# EAGLE board ard_card (EAGLE 5.09)
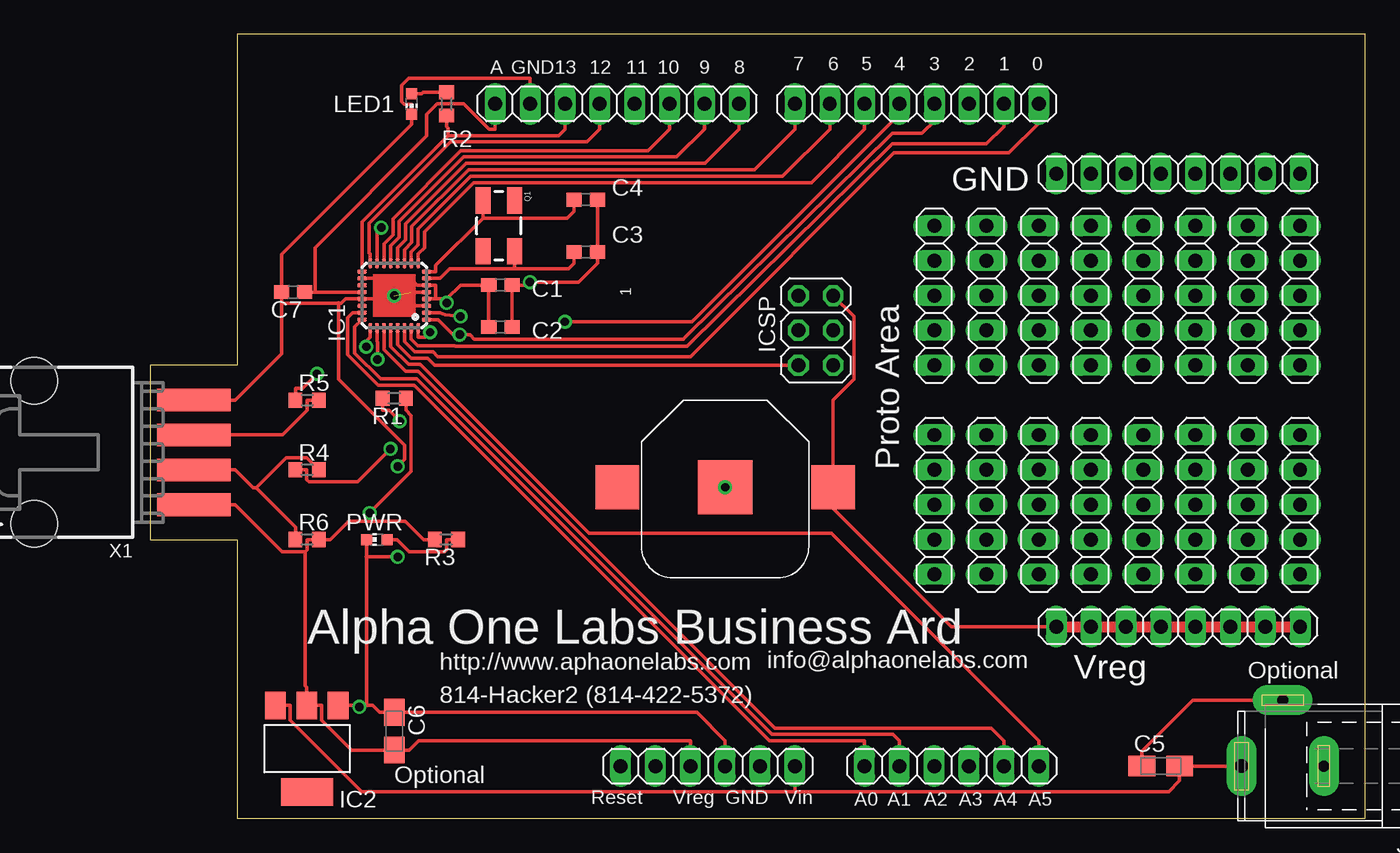
[diagram p0: board, top side]
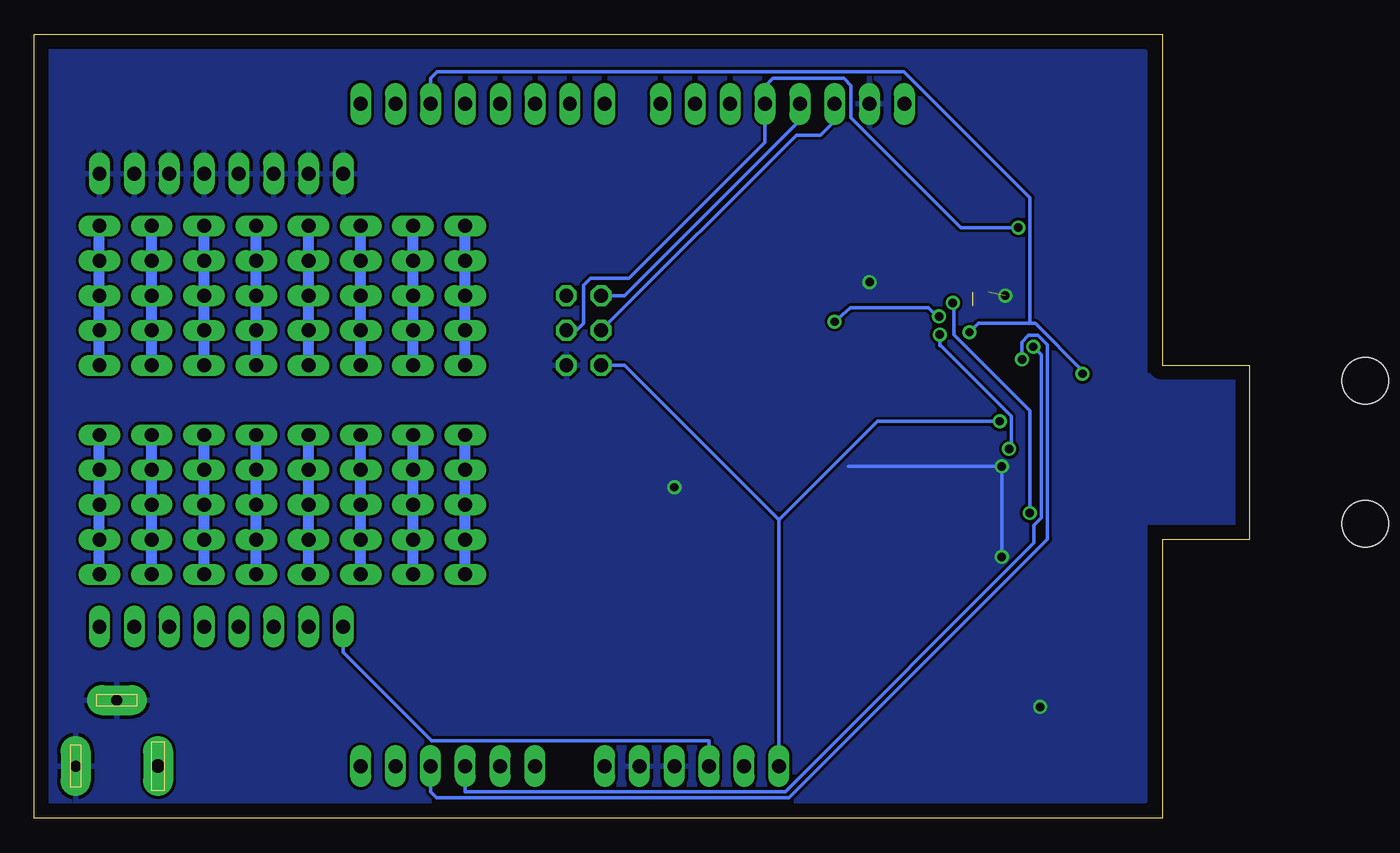
[diagram p1: board, bottom side, seen from below]

Size 88.57 x 57.14 mm. Coordinates in mm from the lower left corner, seen from the top.
Outline: 6.35,0 88.57,0 88.57,57.14 6.35,57.14 6.35,33.02 0,33.02 0,20.32 6.35,20.32 6.35,0
Copper layers (1*16): Top 0.035mm / dielectric 1.5mm / Bottom 0.035mm
Design rules "default": minimum track width 10mil, minimum drill 24mil, track to track 8mil, track to pad 8mil, pad to pad 8mil, via to via 8mil, smd to smd 8mil, copper to edge 40mil, drill to drill 8mil, minimum pad ring 10mil, minimum via ring 8mil, stop-mask expansion 4mil, vias tented up to drill 0mil, thermal gap 10mil
tRestrict: area 17.1,37.3 to 18.5,38.7
vRestrict: area 10.2,6.3 to 63.5,15.2; area 52.7,25.4 to 54.6,38.1; area 58.4,45.7 to 63.5,48.3

## Footprints (pad centres in the part's own frame; a part is rotated, then mirrored left to right if it is on the bottom)
BATTCON_12MM = smd 3.962 x 3.962: GND 0,0 | smd 3.175 x 3.175: PWR@1 -7.874,0; PWR@2 7.874,0
C0603 = smd 1.1 x 1: 1 -0.85,0; 2 0.85,0
A/3216-18R = smd 1.95 x 1.5: + 1.375,0; - -1.375,0
MLF32 = smd 0.7 x 0.3: 1 -2.35,1.75; 2 -2.35,1.25; 3 -2.35,0.75; 4 -2.35,0.25; 5 -2.35,-0.25; 6 -2.35,-0.75; 7 -2.35,-1.25; 8 -2.35,-1.75; 17 2.35,-1.75; 18 2.35,-1.25; 19 2.35,-0.75; 20 2.35,-0.25; 21 2.35,0.25; 22 2.35,0.75; 23 2.35,1.25; 24 2.35,1.75 | smd 0.3 x 0.7: 9 -1.75,-2.35; 10 -1.25,-2.35; 11 -0.75,-2.35; 12 -0.25,-2.35; 13 0.25,-2.35; 14 0.75,-2.35; 15 1.25,-2.35; 16 1.75,-2.35; 25 1.75,2.35; 26 1.25,2.35; 27 0.75,2.35; 28 0.25,2.35; 29 -0.25,2.35; 30 -0.75,2.35; 31 -1.25,2.35; 32 -1.75,2.35
SOT223 = smd 1.499 x 2.007: 1 -2.261,-3.15; 2 0.025,-3.15; 3 2.311,-3.15 | smd 3.81 x 2.007: 4 0,3.15
2X03 = drill 1.016 octagon: 1 -2.54,-1.27; 2 -2.54,1.27; 3 0,-1.27; 4 0,1.27; 5 2.54,-1.27; 6 2.54,1.27
1X08 = drill 1.016 long: 1 -8.89,0; 2 -6.35,0; 3 -3.81,0; 4 -1.27,0; 5 1.27,0; 6 3.81,0; 7 6.35,0; 8 8.89,0
1X06 = drill 1.016 long: 1 -6.35,0; 2 -3.81,0; 3 -1.27,0; 4 1.27,0; 5 3.81,0; 6 6.35,0
SPC4078 = drill 0.8 pad 2.184 long: 1 -3,0; 2 0,-4.8 | drill 1 pad 2.184 long: 3 3,0
1X05 = drill 1.016 long: 1 -5.08,0; 2 -2.54,0; 3 0,0; 4 2.54,0; 5 5.08,0
CHIP-LED0603 = smd 0.8 x 0.8: A 0,-0.75; C 0,0.75
CRYSTAL-SMD-5X3 = smd 1.9 x 1.1: 1 -1.85,-1.15; 2 1.85,-1.15; 3 1.85,1.15; 4 -1.85,1.15
R0603 = smd 1 x 1.1: 1 -0.85,0; 2 0.85,0
15-91-04 = smd 1.651 x 5.334: 1 -3.81,-10.795; 2 -1.27,-10.795; 3 1.27,-10.795; 4 3.81,-10.795 | hole 3.404: -5.207,0.838; 5.207,0.838

## Placement (x,y rotation side)
BAT1  3v  [BATTCON_12MM]  41.91,24.13 180 top
C1  100nf  [C0603]  25.53,38.86 0 top
C2  100nf  [C0603]  25.53,35.81 0 top
C3  20pf  [C0603]  31.75,41.27 0 top
C4  20pf  [C0603]  31.75,45.09 0 top
C5  4.7uf  [A/3216-18R]  73.66,3.81 0 top
C6  4.7uf  [A/3216-18R]  17.78,6.35 270 top
C7  100nf  [C0603]  10.41,38.35 180 top
IC1  MEGA48/88/168-MU  [MLF32]  17.78,38.1 180 top
IC2  REG1117  [SOT223]  11.43,5.08 180 top
ICSP  [2X03]  48.51,35.56 270 top
J1  [1X08]  55.88,52.07 180 top
J2  [1X06]  58.42,3.81 0 top
J3  [1X08]  34.04,52.07 180 top
J4  [SPC4078]  82.55,3.81 180 top
JP1  [1X05]  57.15,38.1 90 top
JP2  [1X05]  60.96,38.1 90 top
JP3  [1X06]  40.64,3.81 0 top
JP4  [1X05]  64.77,38.1 90 top
JP5  [1X05]  68.58,38.1 90 top
JP6  [1X05]  72.39,38.1 90 top
JP7  [1X05]  76.2,38.1 90 top
JP8  [1X05]  80.01,38.1 90 top
JP9  [1X05]  83.82,38.1 90 top
JP10  [1X05]  57.15,22.86 90 top
JP11  [1X05]  64.77,22.86 90 top
JP12  [1X05]  60.96,22.86 90 top
JP13  [1X05]  68.58,22.86 90 top
JP14  [1X05]  72.39,22.86 90 top
JP15  [1X05]  76.2,22.86 90 top
JP16  [1X05]  80.01,22.86 90 top
JP17  [1X05]  83.82,22.86 90 top
JP18  [1X08]  74.93,13.97 180 top
JP19  [1X08]  74.93,46.99 180 top
LED1  [CHIP-LED0603]  19.05,52.07 180 top
PWR  [CHIP-LED0603]  16.51,20.32 90 top
Q1  16MHz  [CRYSTAL-SMD-5X3]  25.4,43.18 270 top
R1  10k  [R0603]  17.78,30.61 180 top
R2  1k  [R0603]  21.59,52.07 90 top
R3  1k  [R0603]  21.59,20.32 180 top
R4  68  [R0603]  11.43,25.4 0 top
R5  68  [R0603]  11.43,30.48 0 top
R6  1k  [R0603]  11.43,20.32 0 top
U$1  [A1_SMALL]  41.91,17.78 0 bottom
X1  C-GRID-04-15-91  [15-91-04]  -7.62,26.67 90 top

## Library data of the parts
BAT1 Q1 = SparkFun.1
C1-C7 R1-R6 = rcl
IC1 = avr-6
IC2 = burr-brown
ICSP J1-J3 JP1-JP19 = pinhead
J4 = con-jack
LED1 PWR = led
U$1 = A1
X1 = con-molex

## Nets
AREF: C7.1 IC1.20 J3.8
D+: IC1.32 J1.3 R5.1
D-: IC1.1 J1.4 R4.1
GND: BAT1.GND C1.2 C2.2 C3.2 C4.2 C5.- C6.- C7.2 IC1.3 IC1.5 IC1.21 IC2.1 ICSP.6 J3.7 J4.1 J4.2 JP3.4 JP3.5 JP19.1 JP19.2 JP19.3 JP19.4 JP19.5 JP19.6 JP19.7 JP19.8 LED1.C PWR.C X1.4
MISO: IC1.16 ICSP.1 J3.5
MOSI: IC1.15 ICSP.4 J3.4
N$1: C3.1 IC1.7 Q1.3
N$2: C4.1 IC1.8 Q1.1
N$3: PWR.A R3.1
N$4: R5.2 X1.3
N$6: LED1.A R2.2
N$7: IC1.23 J2.1
N$8: IC1.24 J2.2
N$9: IC1.25 J2.3
N$10: IC1.26 J2.4
N$11: IC1.27 J2.5
N$12: IC1.28 J2.6
N$13: IC1.30 J1.1
N$14: IC1.31 J1.2
N$15: R4.2 R6.1 X1.2
N$16: JP1.1 JP1.2 JP1.3 JP1.4 JP1.5
N$17: IC1.2 J1.5
N$18: IC1.9 J1.6
N$19: IC1.10 J1.7
N$20: IC1.11 J1.8
N$21: IC1.12 J3.1
N$22: IC1.13 J3.2
N$23: JP2.1 JP2.2 JP2.3 JP2.4 JP2.5
N$24: JP4.1 JP4.2 JP4.3 JP4.4 JP4.5
N$25: JP5.1 JP5.2 JP5.3 JP5.4 JP5.5
N$26: JP6.1 JP6.2 JP6.3 JP6.4 JP6.5
N$27: JP7.1 JP7.2 JP7.3 JP7.4 JP7.5
N$28: JP8.1 JP8.2 JP8.3 JP8.4 JP8.5
N$29: JP9.1 JP9.2 JP9.3 JP9.4 JP9.5
N$30: JP10.1 JP10.2 JP10.3 JP10.4 JP10.5
N$31: JP11.1 JP11.2 JP11.3 JP11.4 JP11.5
N$32: JP12.1 JP12.2 JP12.3 JP12.4 JP12.5
N$33: JP13.1 JP13.2 JP13.3 JP13.4 JP13.5
N$34: JP14.1 JP14.2 JP14.3 JP14.4 JP14.5
N$35: JP15.1 JP15.2 JP15.3 JP15.4 JP15.5
N$36: JP16.1 JP16.2 JP16.3 JP16.4 JP16.5
N$37: JP17.1 JP17.2 JP17.3 JP17.4 JP17.5
RESET: IC1.29 ICSP.5 JP3.1 R1.2
SCK: IC1.17 ICSP.3 J3.6 R2.1
SS: IC1.14 J3.3
VIN: C5.+ IC2.3 J4.3 JP3.6
VREG: BAT1.PWR@1 C1.1 C2.1 C6.+ IC1.4 IC1.6 IC1.18 IC2.2 ICSP.2 JP3.3 JP18.1 JP18.2 JP18.3 JP18.4 JP18.5 JP18.6 JP18.7 JP18.8 R1.1 R3.2 R6.2 X1.1

## Tracks (layer width: path | path; a pad name or v marks a point on that pad's centre or on a via)
AREF
  Top 0.254: 12.01,38.35 IC1.20 | 12.01,38.35 12.01,41.59 20.15,49.73 20.15,51.3 20.92,52.07 22.84,52.07 24.69,50.22 25.15,50.22 J3.8 | C7.1 12.01,38.35
D+  (via drill 0.61 pad 1.02)
  Top 0.254: IC1.32 19.53,35.07 20.04,35.07 v20.39,35.42 | R5.1 10.58,31.36 11.11,31.36 v12.15,32.4
  Bottom 0.254: 15.97,36.07 15.6,36.07 12.15,32.61 v12.15,32.4 | 15.97,36.07 15.97,45.22 25.16,54.4 59.21,54.4 59.69,53.92 J1.3 | 15.97,36.07 19.75,36.07 v20.39,35.42
D-  (via drill 0.61 pad 1.02)
  Top 0.254: IC1.1 20.97,36.35 22.07,35.25 v22.56,35.25 23.3,35.25 23.62,34.92 38.86,34.92 38.99,35.05 54.1,49.91 56.26,49.91 57.28,50.93 57.28,51.94 J1.4 | R4.1 11.41,25.4 11.41,24.67 11.56,24.52 15.11,24.52 v17.51,26.92
  Bottom 0.254: v17.51,26.92 17.35,27.09 17.35,29.3 22.47,34.42 22.56,34.42 v22.56,35.25
GND  (via drill 0.61, 0.61 pad 1.02)  (2 unrouted)
  Top 0.254: X1.4 6.17,30.48 9.56,33.87 9.56,37.52 | 9.56,37.52 C7.2 9.56,41.1 19.05,50.59 LED1.C 19.05,52.05 18.5,52.05 18.32,52.23 18.32,53.42 18.83,53.92 27.69,53.92 J3.7 | 13.72,37.52 9.56,37.52 | 13.72,37.52 13.92,37.52 14.24,37.85 IC1.21 16.6,37.85 | C2.2 C1.2 27.26,38.86 27.48,39.08 v27.67,39.08 31.24,39.08 32.6,40.45 C3.2 C4.2 | C5.- 72.28,4.89 76,8.61 J4.2 | IC1.5 19.02,38.35 | IC1.3 19.02,37.35 | JP3.4 41.91,5.66 39.85,7.72 C6.- 16.7,7.72 16.2,8.23 15.76,8.23 | 15.24,8.23 15.76,8.23 | 15.76,8.23 15.76,19.05 | 15.76,19.05 PWR.C | IC2.1 15.24,8.23 | 15.24,8.23 v15.24,8.13 | 15.76,19.05 v18.03,19.05 | v18.03,25.65 18.54,26.16 18.54,27.18 13.72,32 13.72,37.52 | 15.76,19.05 15.75,19.05 | 13.72,37.52 13.72,37.59
  Bottom 0.254: v18.03,19.05 v18.03,25.65 29.21,25.65
  other vias: 17.78,38.1 41.91,24.13
  pour Bottom: 7.62,55.88 87.63,55.88 87.63,1.27 7.62,1.27 7.62,21.59 0,21.59 0,31.75 0.51,31.75 0.51,32.26 7.62,32.26
  pour Top: 16.38,39.5 19.18,39.5 19.18,36.7 16.38,36.7
MISO
  Top 0.254: IC1.16 16.03,41.13 15.96,41.2 15.96,43.38 21.88,49.3 31.85,49.3 32.77,50.22 J3.5
  Bottom 0.254: J3.5 32.77,50.88 45.54,38.1 ICSP.1
MOSI  (via drill 0.61 pad 1.02)
  Top 0.254: v16.84,43.05 16.53,42.75 IC1.15
  Bottom 0.254: v16.84,43.05 21,43.05 29.02,51.07 29.02,53.4 29.54,53.92 34.72,53.92 35.31,53.34 J3.4 35.31,49.28 45.21,39.37 48.01,39.37 48.51,38.86 48.51,36.07 49.02,35.56 ICSP.4
N$1
  Top 0.254: IC1.7 21.12,39.35 21.82,40.05 26.55,40.05 | C3.1 30.9,40.45 30.5,40.05 26.55,40.05 | 26.55,40.05 Q1.3
N$2
  Top 0.254: IC1.8 20.81,39.85 20.81,40.31 24.25,43.75 | C4.1 30.9,44.26 30.39,43.75 24.25,43.75 | 24.25,43.75 Q1.1
N$3
  Top 0.254: PWR.A 17.99,20.32 18.88,19.43 21.45,19.43 21.61,19.59 21.61,20.32 R3.1
N$4
  Top 0.254: R5.2 11.45,30.48 11.45,29.75 9.64,27.94 X1.3
N$6
  Top 0.254: LED1.A 19.78,52.82 19.88,52.92 R2.2
N$7
  Top 0.254: IC1.23 14.75,36.85 14.38,36.48 14.38,33.8 16.59,31.58 19.23,31.58 45.14,5.66 52.07,5.66 J2.1
N$8
  Top 0.254: IC1.24 14.91,35.83 14.91,33.91 16.78,32.04 19.42,32.04 45.34,6.12 54.15,6.12 54.61,5.66 J2.2
N$9  (via drill 0.61 pad 1.02)
  Top 0.254: v15.75,34.37 15.75,34.79 16.03,35.07 IC1.25
  Bottom 0.254: v15.75,34.37 15.16,33.77 15.16,21.91 15.7,21.36 | 15.7,21.36 | 15.7,21.36 15.7,20.07 33.82,1.96 57.15,1.96 J2.3
N$10  (via drill 0.61 pad 1.02)
  Top 0.254: IC1.26 16.53,34.77 16.59,34.71 16.59,33.48 v16.56,33.45
  Bottom 0.254: v16.56,33.45 16.59,33.48 16.59,34.71 16.09,35.2 15.39,35.2 14.7,34.52 14.7,20.36 33.56,1.49 59.23,1.49 59.69,1.96 J2.4
N$11
  Top 0.254: IC1.27 17.03,35.07 17.04,35.06 17.04,34.15 18.62,32.57 19.53,32.57 45.52,6.58 61.31,6.58 62.23,5.66 J2.5
N$12
  Top 0.254: IC1.28 17.53,34.38 18.83,33.08 19.67,33.08 31.97,20.78 49.66,20.78 64.77,5.66 J2.6
N$13
  Top 0.254: IC1.30 18.53,34.75 19.28,34 20.61,34 20.95,33.66 39.37,33.66 54.23,48.51 62.61,48.51 64.77,50.67 J1.1
N$14
  Top 0.254: IC1.31 19.03,34.91 19.48,34.45 22.17,34.45 22.21,34.41 39.11,34.41 54.1,49.15 60.96,49.15 62.23,50.42 J1.2
N$15
  Top 0.254: 7.7,24.08 9.9,26.28 11.4,26.28 R4.2 | 7.7,24.08 7.5,24.08 6.17,25.4 6.06,25.4 X1.2 | 7.7,24.08 | 7.7,24.08 10.58,21.2 R6.1
N$16
  Bottom 0.813: JP1.5 JP1.4 JP1.3 JP1.2 JP1.1
N$17  (via drill 0.61)
  Top 0.254: v22.61,36.59 21.5,36.71 21.11,36.85 IC1.2 | v30.23,36.2 39.5,36.2 54.61,51.31 J1.5
  Bottom 0.254: v22.61,36.59 22.87,36.71 23.37,37.21 29.08,37.21 v30.23,36.2
N$18
  Top 0.254: IC1.9 19.53,41.13 19.98,41.58 19.98,42.76 23.55,46.33 48.19,46.33 52.07,50.22 J1.6
N$19
  Top 0.254: IC1.10 19.03,41.3 19.52,41.79 19.52,42.96 23.35,46.79 46.1,46.79 49.53,50.22 J1.7
N$20
  Top 0.254: IC1.11 18.53,41.44 19.06,41.98 19.06,43.15 23.2,47.28 44.06,47.28 46.99,50.22 J1.8
N$21
  Top 0.254: IC1.12 18.03,41.59 18.61,42.17 18.61,43.34 23.01,47.74 40.45,47.74 42.93,50.22 J3.1
N$22
  Top 0.254: IC1.13 17.53,41.74 18.15,42.36 18.15,43.52 22.82,48.2 38.37,48.2 40.39,50.22 J3.2
N$23
  Bottom 0.813: JP2.1 JP2.2 JP2.3 JP2.4 JP2.5
N$24
  Bottom 0.813: JP4.5 JP4.4 JP4.3 JP4.2 JP4.1
N$25
  Bottom 0.813: JP5.1 JP5.2 JP5.3 JP5.4 JP5.5
N$26
  Bottom 0.813: JP6.5 JP6.4 JP6.3 JP6.2 JP6.1
N$27
  Bottom 0.813: JP7.1 JP7.2 JP7.3 JP7.4 JP7.5
N$28
  Bottom 0.813: JP8.5 JP8.4 JP8.3 JP8.2 JP8.1
N$29
  Bottom 0.813: JP9.1 JP9.2 JP9.3 JP9.4 JP9.5
N$30
  Bottom 0.813: JP10.1 JP10.2 JP10.3 JP10.4 JP10.5
N$31
  Bottom 0.813: JP11.1 JP11.2 JP11.3 JP11.4 JP11.5
N$32
  Bottom 0.813: JP12.5 JP12.4 JP12.3 JP12.2 JP12.1
N$33
  Bottom 0.813: JP13.5 JP13.4 JP13.3 JP13.2 JP13.1
N$34
  Bottom 0.813: JP14.1 JP14.2 JP14.3 JP14.4 JP14.5
N$35
  Bottom 0.813: JP15.5 JP15.4 JP15.3 JP15.2 JP15.1
N$36
  Bottom 0.813: JP16.5 JP16.4 JP16.3 JP16.2 JP16.1
N$37
  Bottom 0.813: JP17.1 JP17.2 JP17.3 JP17.4 JP17.5
RESET  (via drill 0.61 pad 1.02)
  Top 0.254: IC1.29 18.03,34.53 19.02,33.54 20.21,33.54 20.73,33.02 ICSP.5 | R1.2 16.93,29.73 17.4,29.73 v18.19,28.94
  Bottom 0.254: v18.19,28.94 27.12,28.94 34.29,21.77 | JP3.1 34.29,21.77 | 34.29,21.77 45.54,33.02 ICSP.5
SCK
  Top 0.254: 21.69,49.76 15.43,43.49 IC1.17 | 21.69,49.76 29.77,49.76 30.23,50.22 J3.6 | 21.69,49.76 21.69,50.29 21.59,50.39 R2.1
  Bottom 0.254: J3.6 30.23,50.8 31.24,49.78 33.02,49.78 ICSP.3
SS
  Top 0.254: IC1.14 17.03,41.88 17.69,42.55 17.69,43.71 22.64,48.66 36.29,48.66 37.85,50.22 J3.3
VIN
  Top 0.254: 46.99,1.96 74.26,1.96 75.03,2.73 C5.+ J4.3 | IC2.3 10.2,8.23 10.2,7.15 15.39,1.96 46.99,1.96 | 46.99,1.96 JP3.6
VREG  (via drill 0.61 pad 1.02)
  Top 0.254: JP3.3 39.37,5.66 19.55,5.66 18.86,4.97 C6.+ 14.66,4.97 12.48,7.15 12.48,8.23 IC2.2 11.4,9.56 11.29,9.68 11.29,19.43 | 20.81,37.85 20.81,38.85 IC1.6 19.45,38.85 18.95,39.35 IC1.18 | v21.62,37.57 21.62,37.85 | 21.62,37.85 22.63,38.86 C1.1 C2.1 | 21.62,37.85 20.81,37.85 | 20.81,37.85 IC1.4 | 15.99,21.65 v15.99,22.26 19.03,25.29 19.03,29.33 18.63,29.73 R1.1 | R3.2 19.91,20.32 18.58,21.65 15.99,21.65 | 15.99,21.65 14.44,21.65 13.11,20.32 R6.2 11.45,20.32 11.45,19.59 11.29,19.43 | 11.29,19.43 9.6,19.43 6.17,22.86 X1.1 | JP18.8 58.42,13.97 49.78,22.61 BAT1.PWR@1 49.78,30.48 51.31,32 51.31,36.58 ICSP.2
  Top 0.813: JP18.8 JP18.7 JP18.6 JP18.5 JP18.4 JP18.3 JP18.2 JP18.1
  Bottom 0.254: v15.99,22.26 15.99,29.72 21.53,35.26 21.53,37.49 v21.62,37.57 | JP18.8 66.04,12.12 59.59,5.66 39.37,5.66 JP3.3

## Text on the board
tNames: A | GND | 13 | 12 | 11 | 10 | 9 | 8 | 7 | 6 | 5 | 4 | 3 | 2 | 1 | 0 | GND | 1 | Proto Area | Alpha One Labs Business Ard | http://www.aphaonelabs.com | info@alphaonelabs.com | Vreg | Optional | 814-Hacker2 (814-422-5372) | Optional | Reset | Vreg | GND | Vin | A0 | A1 | A2 | A3 | A4 | A5
bValues: Designed by Robert M Diamond (c) 2010 | Diamond Cutter V0.1
anim: 1 1.0 | 2 8.0 | 5 2.0 | 4 10.0 | 3 7.5